# EAGLE board ESC PRODUKSI (EAGLE 9.6.2)
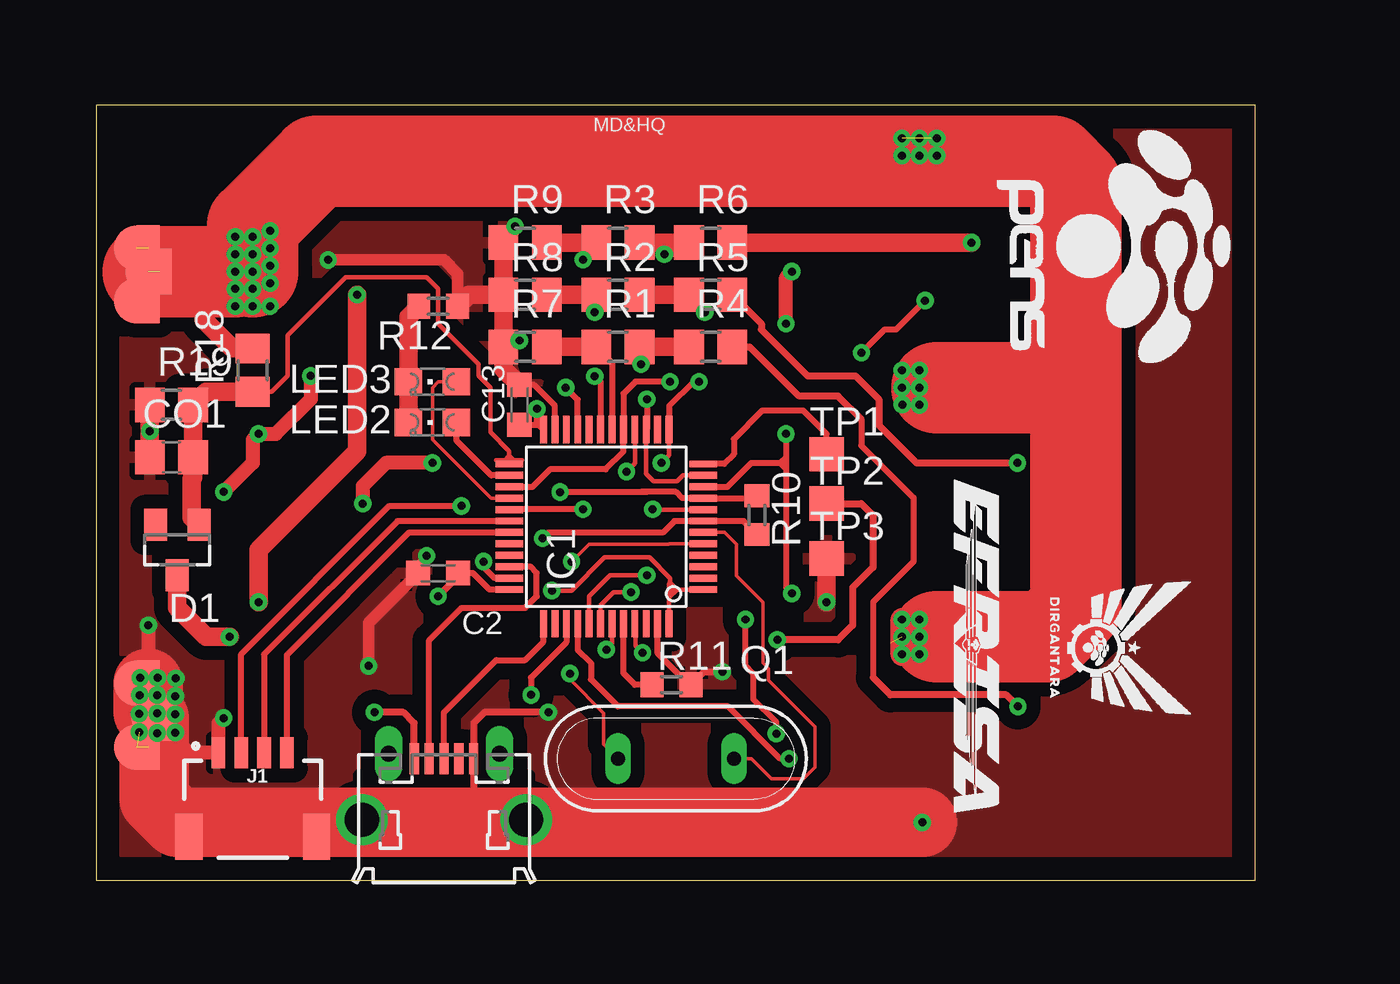
[diagram p0: board, top side]
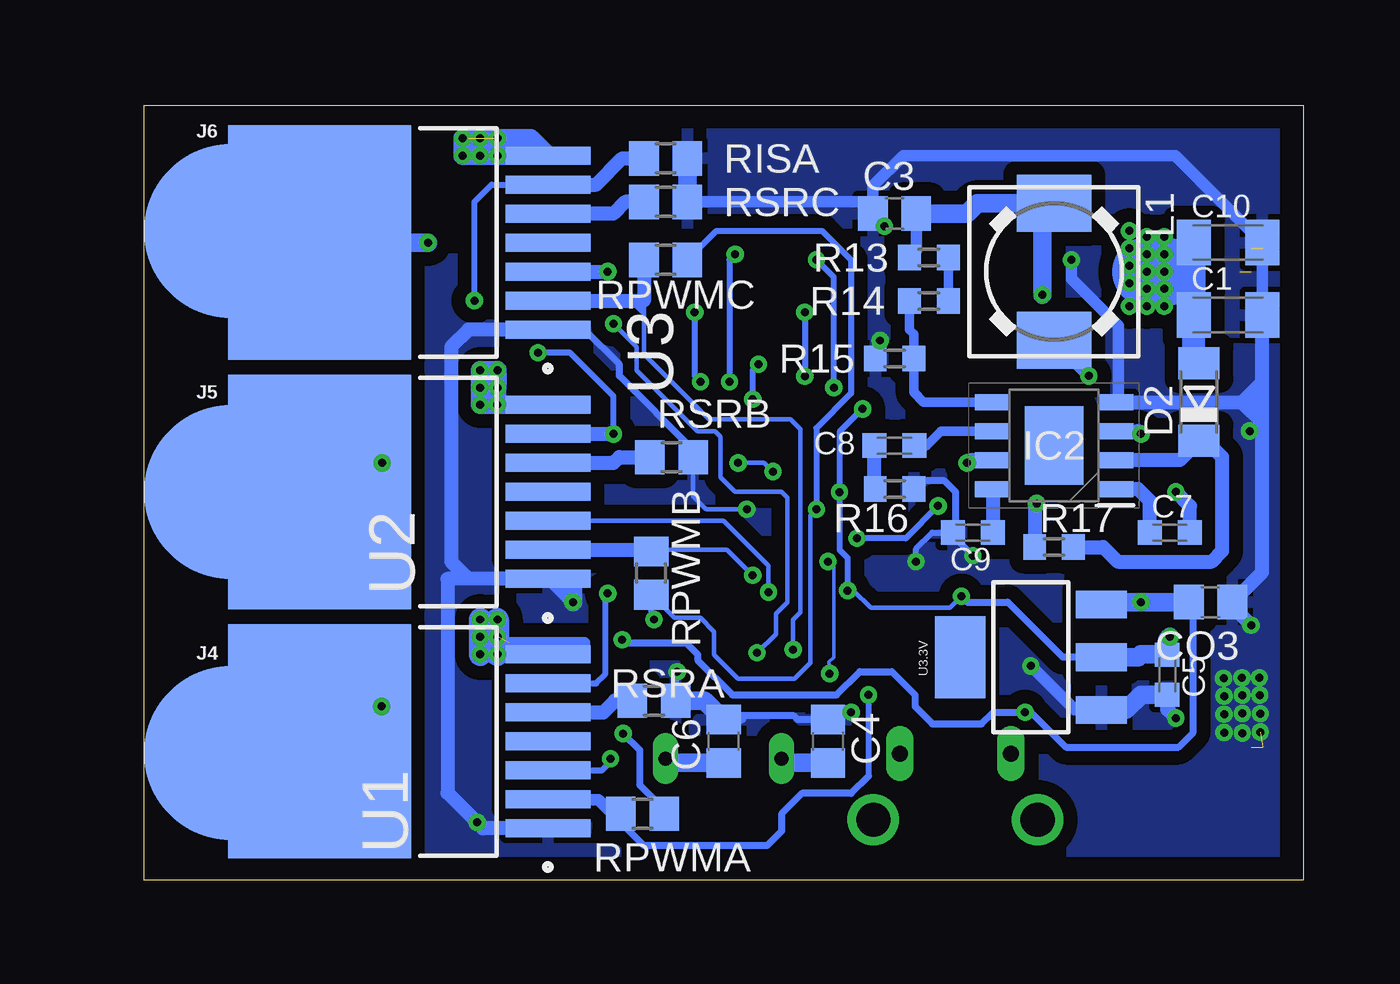
[diagram p1: board, bottom side, seen from below]

Size 50.78 x 33.96 mm. Coordinates in mm from the lower left corner, seen from the top.
Outline: 0,0 50.78,0 50.78,33.96 0,33.96 0,0
Copper layers (1*16): Top 0.035mm / dielectric 1.5mm / Bottom 0.035mm
Design rules "default *": minimum track width 6mil, minimum drill 0.35mm, track to track 24mil, track to pad 24mil, pad to pad 24mil, via to via 24mil, smd to smd 6mil, copper to edge 40mil, drill to drill 6mil, minimum pad ring 10mil, minimum via ring 8mil, stop-mask expansion 4mil, vias tented up to drill 0mil, thermal gap 10mil

## Footprints (pad centres in the part's own frame; a part is rotated, then mirrored left to right if it is on the bottom)
C1206K = smd 1.5 x 2: 1 -1.5,0; 2 1.5,0
C0603K = smd 1.05 x 1.08: 1 -0.875,0; 2 0.875,0
C0805 = smd 1.3 x 1.5: 1 -0.95,0; 2 0.95,0
SOT23 = smd 1 x 1.4: 1 -0.95,-1.1; 2 0.95,-1.1; 3 0,1.1
SOD80C = smd 1.4 x 1.8: A 1.7,0; C -1.7,0
LQFP48 = smd 0.3 x 1.2: 1 -2.75,-4.25; 2 -2.25,-4.25; 3 -1.75,-4.25; 4 -1.25,-4.25; 5 -0.75,-4.25; 6 -0.25,-4.25; 7 0.25,-4.25; 8 0.75,-4.25; 9 1.25,-4.25; 10 1.75,-4.25; 11 2.25,-4.25; 12 2.75,-4.25; 25 2.75,4.25; 26 2.25,4.25; 27 1.75,4.25; 28 1.25,4.25; 29 0.75,4.25; 30 0.25,4.25; 31 -0.25,4.25; 32 -0.75,4.25; 33 -1.25,4.25; 34 -1.75,4.25; 35 -2.25,4.25; 36 -2.75,4.25 | smd 1.2 x 0.3: 13 4.25,-2.75; 14 4.25,-2.25; 15 4.25,-1.75; 16 4.25,-1.25; 17 4.25,-0.75; 18 4.25,-0.25; 19 4.25,0.25; 20 4.25,0.75; 21 4.25,1.25; 22 4.25,1.75; 23 4.25,2.25; 24 4.25,2.75; 37 -4.25,2.75; 38 -4.25,2.25; 39 -4.25,1.75; 40 -4.25,1.25; 41 -4.25,0.75; 42 -4.25,0.25; 43 -4.25,-0.25; 44 -4.25,-0.75; 45 -4.25,-1.25; 46 -4.25,-1.75; 47 -4.25,-2.25; 48 -4.25,-2.75
SOIC127P600X170-9N = smd 1.525 x 0.7: 1 -2.712,1.905; 2 -2.712,0.635; 3 -2.712,-0.635; 4 -2.712,-1.905; 5 2.712,-1.905; 6 2.712,-0.635; 7 2.712,0.635; 8 2.712,1.905 | smd 2.56 x 3.45: 9 0,0
JST04_1MM_RA = smd 0.6 x 1.35: 1 -1.5,0; 2 -0.5,0; 3 0.5,0; 4 1.5,0 | smd 1.2 x 2: NC1 2.8,-3.675; NC2 -2.8,-3.675
CIRCULARPAD = smd 2 x 2: P$1 0,0 | smd 2.007 x 1.016: P$2 0,-0.508
SNAP-MALE = smd 7.62 x 7.62: 2 0,0
DR74 = smd 2.5 x 3.25: 1 -3,0; 2 3,0
CHIPLED_0805 = smd 1.2 x 1.2: A 0,-1.05; C 0,1.05
QS = drill 0.61 long: 1 -2.54,0; 2 2.54,0
R0805 = smd 1.3 x 1.5: 1 -0.95,0; 2 0.95,0
R0603 = smd 1 x 1.1: 1 -0.85,0; 2 0.85,0
TP15SQ = smd 1.5 x 1.5: TP 0,0
TO127P1500X440-8N-1 = smd 3.708 x 0.787: 1 -5.004,3.81; 2 -5.004,2.54; 3 -5.004,1.27; 4 -5.004,0; 5 -5.004,-1.27; 6 -5.004,-2.54; 7 -5.004,-3.81 | smd 8.001 x 10.262: 8 5.004,0
SOT223 = smd 1.219 x 2.235: 1 -2.311,-3.099; 2 0,-3.099; 3 2.311,-3.099 | smd 3.6 x 2.2: 4 0,3.099
ZX62D-B-5PA8 = smd 1.35 x 0.4: 1 4.825,1.3; 2 4.825,0.65; 3 4.825,0; 4 4.825,-0.65; 5 4.825,-1.3 | drill 1.5: S1 2.15,-3.6; S2 2.15,3.6 | drill 0.7 long: S3 5.05,2.425; S4 5.05,-2.425

## Placement (x,y rotation side)
C1  10u  [C1206K]  3.3,24.77 0 bottom
C2  100n  [C0603K]  14.99,13.46 180 top
C3  100nF  [C0805]  17.91,29.21 0 bottom
C4  22pF  [C0805]  20.83,6.1 270 bottom
C5  100n  [C0603K]  5.97,9.02 270 bottom
C6  22pF  [C0805]  25.4,6.1 270 bottom
C7  10n  [C0603K]  5.84,15.24 0 bottom
C8  3.9n  [C0603K]  17.91,19.05 180 bottom
C9  100n  [C0603K]  14.48,15.24 180 bottom
C10  10u  [C1206K]  3.3,27.94 0 bottom
C13  100n  [C0603K]  18.54,20.83 90 top
CO1  100nF  [C0805]  3.3,18.54 0 top
CO3  22uF  [C0805]  4.06,12.19 180 bottom
D1  BAT54  [SOT23]  3.56,14.48 180 top
D2  [SOD80C]  4.57,20.95 90 bottom
IC1  STM32F303CBT  [LQFP48]  22.35,15.49 90 top
IC2  MP2307DN-LF-Z  [SOIC127P600X170-9N]  10.92,19.05 180 bottom
J1  [JST04_1MM_RA]  6.86,5.59 0 top
J2  LED_PAD  [CIRCULARPAD]  1.78,8.64 90 top
J3  LED_PAD  [CIRCULARPAD]  1.78,25.4 90 top
J4  [SNAP-MALE]  46.99,5.59 0 bottom
J5  [SNAP-MALE]  46.99,17.02 0 bottom
J6  [SNAP-MALE]  46.99,28.45 0 bottom
J7  LED_PAD  [CIRCULARPAD]  1.78,27.69 90 top
J8  LED_PAD  [CIRCULARPAD]  1.78,5.84 90 top
J9  LED_PAD  [CIRCULARPAD]  2.29,26.67 90 top
J10  LED_PAD  [CIRCULARPAD]  2.54,7.11 90 top
L1  4R7  [DR74]  10.92,26.67 270 bottom
LED2  Red  [CHIPLED_0805]  14.73,20.07 90 top
LED3  hijau  [CHIPLED_0805]  14.73,21.84 90 top
Q1  16Mhz  [QS]  25.4,5.33 0 top
R1  20K  [R0805]  22.86,23.37 0 top
R2  20K  [R0805]  22.86,25.65 0 top
R3  20K  [R0805]  22.86,27.94 0 top
R4  100K  [R0805]  26.92,23.37 0 top
R5  100K  [R0805]  26.92,25.65 0 top
R6  100K  [R0805]  26.92,27.94 0 top
R7  82K  [R0805]  18.8,23.37 0 top
R8  82K  [R0805]  18.8,25.65 0 top
R9  82K  [R0805]  18.8,27.94 0 top
R10  10k  [R0603]  28.96,16 90 top
R11  10k  [R0603]  25.21,8.57 0 top
R12  100R  [R0603]  14.99,25.15 180 top
R13  43k  [R0603]  16.41,27.29 0 bottom
R14  1,2K  [R0603]  16.41,25.38 180 bottom
R15  10k  [R0603]  17.91,22.86 0 bottom
R16  6.8k  [R0603]  17.91,17.14 180 bottom
R17  100K  [R0603]  10.92,14.61 0 bottom
R18  100K  [R0805]  6.86,22.35 90 top
R19  20K  [R0805]  3.3,20.83 0 top
RISA  1k  [R0805]  27.94,31.62 0 bottom
RPWMA  10k  [R0805]  28.96,2.92 0 bottom
RPWMB  10k  [R0805]  28.57,13.46 270 bottom
RPWMC  10k  [R0805]  27.94,27.18 0 bottom
RSRA  20R  [R0805]  28.45,7.87 0 bottom
RSRB  20R  [R0805]  27.69,18.54 0 bottom
RSRC  20R  [R0805]  27.94,29.72 0 bottom
TP1  PTR1TP15SQ  [TP15SQ]  32,18.67 0 top
TP2  PTR1TP15SQ  [TP15SQ]  32,16.51 0 top
TP3  PTR1TP15SQ  [TP15SQ]  32,14.1 0 top
U1  BTN8962TA  [TO127P1500X440-8N-1]  38.1,6.1 180 bottom
U2  BTN8962TA  [TO127P1500X440-8N-1]  38.1,17.02 180 bottom
U3  BTN8962TA  [TO127P1500X440-8N-1]  38.1,27.94 180 bottom
U3.3V  V_REG_317SMD  [SOT223]  11.94,9.78 90 bottom
X1  ZX62D-B-5PA8  [ZX62D-B-5PA8]  15.24,0.51 90 top

## Library data of the parts
C1 C2 C5 C7-C10 C13 = rcl; SPICEPREFIX: C
C3 C4 C6 CO1 CO3 RISA RPWMA RPWMB RPWMC RSRA RSRB RSRC = rcl
D1 D2 = diode
IC1 = STM32F303x; SPICEPREFIX: X
IC2 = MP2307DN-LF-Z; ARROW_PART_NUMBER: MP2307DN-LF-Z; DESCRIPTION: Switching Voltage Regulators 3A/23VSynchRectified Step-down Converter; HEIGHT: 1.7mm; MANUFACTURER_NAME: Monolithic Power Systems (MPS); MANUFACTURER_PART_NUMBER: MP2307DN-LF-Z; MOUSER_PART_NUMBER: 946-MP2307DNLFZ; MOUSER_PRICE-STOCK: https://www.mouser.co.uk/ProductDetail/Monolithic-Power-Systems-MPS/MP2307DN-LF-Z?qs=rC7bBWoQAAmsFilkwcof5g%3D%3D
J1 = SparkFun-Connectors; PROD_ID: CONN-10310; SF_ID: PRT-10208
J2-J10 = SparkFun-Connectors
L1 = inductors; SPICEPREFIX: L
LED2 LED3 = led
Q1 = special
R1-R19 = rcl; SPICEPREFIX: R
TP1-TP3 = testpad
U1-U3 = BTN8962TA
U3.3V = SparkFun-PowerIC
X1 = zx62d-b-5pa8-oshpark_10; MF: Hirose; MPN: ZX62D-B-5PA8; OC_FARNELL: 2300438; OC_NEWARK: 69W0712

## Nets
1: D2.C IC2.2 R17.2
5V: C3.2 CO3.2 L1.1 R13.1 TP2.TP U3.3V.3 X1.1
12V: C1.1 C10.1 D2.A J3.P$1 J3.P$2 J7.P$1 J7.P$2 J9.P$1 J9.P$2 R18.2 U1.7 U2.7 U3.7
GND: C1.2 C2.2 C3.1 C4.1 C5.2 C6.1 C9.2 C10.2 C13.2 CO1.1 CO3.1 IC1.8 IC1.23 IC1.35 IC1.47 IC2.4 J1.1 J2.P$1 J2.P$2 J8.P$1 J8.P$2 J10.P$1 J10.P$2 R7.1 R8.1 R9.1 R11.2 R12.1 R15.1 R16.1 R19.1 RISA.2 RSRA.2 RSRB.2 RSRC.2 TP3.TP U1.1 U2.1 U3.1 U3.3V.1 X1.5
N$1: RSRA.1 U1.5
N$2: RSRB.1 U2.5
N$3: RSRC.1 U3.5
N$4: C4.2 IC1.5 Q1.1
N$5: C7.1 IC2.1
N$6: C7.2 IC2.3 L1.2
N$7: C6.2 IC1.6 Q1.2
N$8: LED2.C LED3.C R12.2
N$10: IC1.44 R11.1
N$12: R13.2 R14.1
N$13: IC2.5 R14.2 R15.2
N$14: C8.2 R16.2
N$15: C8.1 IC2.6
N$16: IC2.7 R17.1
N$17: IC1.4
N$18: IC1.3
N$19: IC1.2
N$20: C9.1 IC2.8
PA0: IC1.10 RISA.1 U1.6 U2.6 U3.6
PA1: IC1.11 IC1.15 R1.2 R4.1
PA3: IC1.13 IC1.16 R2.2 R5.1
PA8: IC1.29 RPWMA.2 RPWMB.2 RPWMC.2
PB0: IC1.18 R1.1 R7.2
PB1: IC1.19 R2.1 R8.2
PB3: IC1.39 RPWMA.1 U1.2
PB4: IC1.40 U1.3
PB5: IC1.41 RPWMB.1 U2.2
PB6: IC1.42 U2.3
PB7: IC1.43 RPWMC.1 U3.2
PB8: IC1.45 U3.3
PB10: IC1.21 R3.1 R9.2
PB12: CO1.2 D1.1 IC1.25 R18.1 R19.2
PB13: IC1.26 LED2.A
PB14: IC1.17 IC1.27 R3.2 R6.1
PB15: IC1.28 LED3.A
PHASE_A: J4.2 R4.2 U1.8
PHASE_B: J5.2 R5.2 U2.8
PHASE_C: J6.2 R6.2 U3.8
PWM_IN: IC1.12 TP1.TP
RST: IC1.7 J1.2 R10.1
RX: IC1.31 J1.4
SWCLK: IC1.37 X1.3
SWDIO: IC1.34 X1.2
TX: IC1.30 J1.3
VCC: C2.1 C5.1 C13.1 D1.3 IC1.1 IC1.9 IC1.24 IC1.36 IC1.48 R10.2 U3.3V.2

## Tracks (layer width: path | path; a pad name or v marks a point on that pad's centre or on a via)
1
  Bottom 0.61: IC2.2 5.41,18.41 D2.C 4.27,19.25 3.56,18.54 3.56,14.43 4.02,13.97 8.13,13.97 8.76,14.61 R17.2
5V  (via drill 0.35)
  Top 0.305: X1.1 13.94,6.89 13.46,7.37 v12.19,7.37 | TP2.TP 33.53,16.51 34.04,16 34.04,13.72 33.15,12.83 33.15,11.18 32.51,10.54 v29.85,10.54
  Top 0.813: v7.11,12.19 7.11,14.48 11.43,18.8 v11.43,25.65
  Bottom 0.305: CO3.2 4.83,12 4.83,6.48 5.46,5.84 10.41,5.84 11.94,7.37 v12.19,7.37 13.59,7.37 14.1,6.86 16.26,6.86 17.02,7.62 17.02,8.13 18.03,9.14 19.43,9.14 20.45,8.13 25.02,8.13 26.54,9.65 26.54,9.91 27.05,10.41 29.72,10.41 | 17.31,27.56 17.26,27.5 R13.1
  Bottom 0.406: R13.1 17.16,27.29 | v29.85,10.54 29.72,10.41
  Bottom 0.508: C3.2 16.96,27.59 R13.1
  Bottom 0.813: L1.1 11.43,29.67 | 11.43,29.67 14.27,29.67 14.73,29.21 C3.2 | CO3.2 v7.11,12.19 8.74,12.19 U3.3V.3 | v11.43,25.65 11.43,29.67
12V  (via drill 0.35)  (4 unrouted)
  Top 0.203: v36.07,10.67 36.83,10.67
  Top 0.254: 36.83,21.59 v36.07,21.59
  Top 0.61: 36.58,31.75 36.58,31.5
  Top 0.813: 36.58,32.51 36.58,31.75 | J9.P$1 J3.P$2 | J7.P$1 2.29,27.18 J9.P$1 | J3.P$1 1.78,26.16 J9.P$1 | R18.2 5.97,23.3 4.7,24.57 4.7,26.48 4.89,26.67
  Top 1.016: v36.07,11.43 v35.31,11.43 v35.31,10.67 v35.31,9.91
  Top 4: J9.P$1 4.89,26.67 v6.1,26.67 | v6.86,26.67 6.86,28.7 9.65,31.5 36.58,31.5 41.91,31.5 42.93,30.48 42.93,21.84 | 36.83,10.67 41.66,10.67 42.93,11.94 42.93,21.84 | 42.93,21.84 42.67,21.59 36.83,21.59
  Bottom 0.203: 34.54,9.91 v35.31,10.67
  Bottom 0.254: v6.1,26.67 5.99,26.77 5.82,26.77 5.44,27.16 5.44,27.3 C10.1
  Bottom 0.508: 33.6,10.41 31.5,10.41 31.5,10.16 31.62,10.03 | v35.31,10.67 v36.07,10.67 v36.07,9.91 v35.31,9.91 | U1.7 33.6,10.41 | 33.6,10.41 34.8,10.41
  Bottom 0.61: U3.7 34.04,31.75 | v35.31,22.35 35.31,21.01 35.13,20.83 U2.7 | 34.54,9.91 35.31,10.29 v35.31,10.67
  Bottom 0.813: v36.07,20.83 v36.07,21.59 v36.07,22.35 v35.31,22.35 v35.31,21.59 35.32,21.58 35.32,20.88 35.34,20.86 | v35.32,20.84 36.06,20.84 v36.07,20.83 | U2.7 v36.07,20.83 | U3.7 33.86,32.51 v35.31,32.51 36.83,32.51 36.83,31.75 35.05,31.75
  Bottom 1.016: C10.1 C1.1 4.8,22.88 D2.A | v35.31,11.43 v35.31,10.67 v35.31,9.91 | v36.07,11.43 v36.07,9.91
  Bottom 3.048: v6.1,26.67 v6.86,26.67
GND  (via drill 0.35)  (2 unrouted)
  Top 0.203: IC1.8 24.4,16.24 v24.38,16.26
  Top 0.254: IC1.35 17.46,13.24 16.97,13.73 v16.97,13.97 | R11.2 25.97,8.57 24.6,9.94 IC1.47 | IC1.23 20.1,20.79 19.19,21.7 C13.2 | v18.54,23.65 18.13,23.65 R7.1
  Top 0.305: X1.5 16.54,4.79 16.51,4.76 | X1.5 16.54,2.57 16.51,2.54 | X1.5 16.54,6.89 17.02,7.37 v19.81,7.37 | R11.2 26.63,9.14 v27.43,9.14 | C2.2 14.11,13.86 v14.48,14.22
  Top 0.508: R12.1 15.84,26.58 15.24,27.18 v10.16,27.18 | R9.1 18.26,28.35 18.26,28.56 v18.36,28.66 | C2.2 11.94,11.29 v11.94,9.4
  Top 0.61: J10.P$1 4.06,5.59 J1.1 5.36,6.88 v5.59,7.11 | v2.29,11.18 2.29,8.89 2.29,7.37
  Top 0.813: R9.1 R8.1 | R8.1 R7.1 17.85,22.4 C13.2 | R12.1 16.34,25.65 R8.1 | J2.P$1 2.03,8.64 2.29,8.89 | R19.1 v2.35,19.68 CO1.1 | TP3.TP v32,12.19
  Top 3.048: v36.19,2.54 16.51,2.54 3.56,2.54 2.54,3.56 J10.P$1 2.29,7.37 J2.P$2
  Bottom 0.203: v24.38,16.26 26.16,16.26 26.74,16.83 RSRB.2 | v2.35,19.68 1.8,19.68
  Bottom 0.254: v16.97,13.97 16.97,14.53 16.26,15.24 C9.2 | R15.1 18.76,23.43 v18.54,23.65
  Bottom 0.305: 24.57,7.05 C6.1 25.23,7.21 22.31,7.21 22.14,7.05 C4.1 20.51,7.37 v19.81,7.37 | v27.43,9.14 27.5,9.08 RSRA.2 | R16.1 16.68,17.53 15.75,17.53 15.24,17.02 15.24,15.35 C9.2 15.35,15.1 v14.48,14.22 | RSRB.2 26.74,18.86 29.97,22.1 29.97,22.61 31.5,24.13 U3.1
  Bottom 0.508: v10.16,27.18 10.16,26.36 8.11,24.3 8.11,21.19 7.87,20.95 | RSRC.2 19.36,29.72 C3.1 | C3.1 18.86,30.42 17.53,31.75 5.61,31.75 C10.2 C1.2 | C3.1 18.86,29.16 v18.36,28.66 | v11.94,9.4 10.01,7.47 U3.3V.1
  Bottom 0.61: U1.1 35.94,2.29 v36.19,2.54 37.5,3.84 37.5,13.21 U2.1 | U3.1 36.58,24.13 37.34,23.37 37.34,13.97 36.7,13.33 | IC2.4 7.87,20.95 2.67,20.95 | 1.8,21.82 C1.2 | 1.8,21.82 2.54,21.08 | 2.54,21.08 2.67,20.95 | v5.59,7.11 5.97,7.49 C5.2 | v2.29,11.18 3.11,12 CO3.1 1.8,13.5 1.8,19.68 1.8,20.07 | 1.8,20.07 1.8,21.08 | 1.8,21.08 1.8,21.82 | 2.67,20.95 2.67,20.93 1.8,20.07 | 2.54,21.08 1.8,21.08 | v32,12.19 32.98,13.17 33.1,13.17
  Bottom 0.813: RSRC.2 RISA.2 | C6.1 26.23,7.87 RSRA.2 | U3.3V.1 7.77,7.47 7.1,8.14 C5.2 | v32,12.19 32,12.95
  other vias: 1.93,8.88 2.69,8.88 1.91,8.12 2.67,8.12 1.89,7.3 2.67,7.32 1.89,6.5 2.67,6.46 3.49,8.86 3.47,8.08 3.47,7.28 3.47,6.48
  pour Top (isolate 0.254): 0.25,33.78 0.25,0.25 50.55,0.25 50.55,33.78
  pour Bottom: 0.25,33.78 0.25,0.25 50.55,0.25 50.55,33.78
N$1
  Bottom 0.61: U1.5 30.67,7.37 30.16,7.87 RSRA.1
N$2
  Bottom 0.61: U2.5 30.23,18.29 29.97,18.54 RSRB.1
N$3
  Bottom 0.61: RSRC.1 29.72,29.72 30.23,29.21 U3.5
N$4  (via drill 0.35)
  Top 0.152: v20.75,9.06 20.75,8.8 22.22,7.33 22.22,5.97 Q1.1 | v20.83,13.97 21.59,14.73 25.08,14.73 25.09,14.74 IC1.5
  Bottom 0.152: v20.83,13.97 20.57,13.72 20.57,9.78 20.78,9.58 20.78,9.08 v20.75,9.06
  Bottom 0.813: C4.2 22.67,5.15 Q1.1
N$5
  Bottom 0.61: C7.1 6.72,16.62 7.24,17.14 IC2.1
N$6  (via drill 0.35)
  Top 0.61: v9.4,22.1 9.4,21.08 7.87,19.56 v7.11,19.56 6.86,19.3 6.86,18.29 v5.59,17.02
  Bottom 0.61: IC2.3 7.24,19.68 v7.11,19.56 | L1.2 9.4,22.15 v9.4,22.1 | C7.2 4.97,16.4 v5.59,17.02
N$7
  Top 0.152: Q1.2 28.7,5.33 29.59,4.45 30.99,4.45 31.5,4.95 31.5,6.73 29.46,8.76 29.46,9.27 29.21,9.53 29.21,12.19 28.05,13.35 28.05,14.73 27.54,15.24 IC1.6
  Bottom 0.813: C6.2 27.75,5.15 Q1.2
N$8
  Top 0.813: LED2.C LED3.C 13.68,24.69 R12.2
N$9  (via drill 0.35)
  other vias: 6.1,28.19
N$10
  Top 0.254: IC1.44 23.1,9.08 23.61,8.57 R11.1
N$11  (via drill 0.35)
  other vias: 6.1,27.43
N$12
  Bottom 0.406: R13.2 R14.1
N$13
  Bottom 0.406: R14.2 17.26,24.11 17.06,23.91 R15.2 17.06,21.38 16.64,20.95 IC2.5
N$14
  Bottom 0.61: R16.2 18.78,17.17 C8.2
N$15
  Bottom 0.406: C8.1 16.52,19.05 15.89,19.68 IC2.6
N$16  (via drill 0.35)
  Top 0.61: v14.73,18.29 12.7,18.29 11.68,17.27 v11.68,16.51
  Bottom 0.61: IC2.7 14.61,18.41 v14.73,18.29 | v11.68,16.51 11.77,16.42 R17.1
N$20
  Bottom 0.61: IC2.8 13.6,17.11 C9.1
N$21  (via drill 0.35)
  other vias: 6.1,25.91
N$22  (via drill 0.35)
  other vias: 6.1,25.15
N$23  (via drill 0.35)
  other vias: 6.86,28.19
N$24  (via drill 0.35)
  other vias: 6.86,27.43
N$25  (via drill 0.35)
  other vias: 6.86,25.91
N$26  (via drill 0.35)
  other vias: 6.86,25.15
N$27  (via drill 0.35)
  other vias: 7.62,28.45
N$28  (via drill 0.35)
  other vias: 7.62,27.69
N$29  (via drill 0.35)
  other vias: 7.62,26.92
N$30  (via drill 0.35)
  other vias: 7.62,26.16
N$31  (via drill 0.35)
  other vias: 7.62,25.15
N$32  (via drill 0.35)
  Top 0.254: v36.07,32.51 35.31,32.51
N$33  (via drill 0.35)
  other vias: 36.83,32.51
N$34  (via drill 0.35)
  other vias: 36.07,31.75
N$35  (via drill 0.35)
  other vias: 35.31,31.75
N$36  (via drill 0.35)
  other vias: 36.83,31.75
PA0  (via drill 0.35)
  Top 0.254: IC1.10 27.66,17.24 28.7,18.29 29.97,18.29 | v30.23,19.56 30.23,18.54 | 30.23,18.54 30.23,18.29 | 30.23,18.29 30.23,18.03 | 30.23,18.03 30.23,12.83 v30.48,12.57 | v33.53,23.11 34.54,24.13 35.05,24.13 v36.32,25.4 | 30.23,18.29 29.97,18.29 | 30.23,18.54 29.97,18.29 | 29.97,18.29 30.23,18.03
  Bottom 0.254: U1.6 30.99,8.64 30.61,9.02 30.61,12.45 v30.48,12.57 | v30.23,19.56 30.23,21.21 32.13,23.11 v33.53,23.11 | v36.32,25.4 36.32,29.72 35.56,30.48 U3.6
  Bottom 0.61: U3.6 30.99,30.48 29.85,31.62 RISA.1 | U2.6 v30.23,19.56
PA1  (via drill 0.35)
  Top 0.203: IC1.11 25.71,17.74 25.46,17.49 24.42,17.49 24.1,17.81 IC1.15
  Top 0.254: 25.15,23.37 24.64,23.37 v23.88,22.61 | v24.13,21.08 24.13,19.77 IC1.15
  Top 0.813: R1.2 25.15,23.37 R4.1
  Bottom 0.254: v23.88,22.61 24.13,22.35 v24.13,21.08
PA3  (via drill 0.35)
  Top 0.203: IC1.13 25.1,18.62 v24.76,18.29 | IC1.16 23.6,18.27 v23.24,17.91
  Top 0.254: R5.1 26.67,24.96 v26.67,24.89 | IC1.13 25.1,20.78 26.16,21.84 v26.42,21.84
  Top 0.813: R5.1 R2.2
  Bottom 0.203: v24.76,18.29 23.62,18.29 v23.24,17.91
  Bottom 0.254: v26.67,24.89 26.67,22.1 v26.42,21.84
PA8  (via drill 0.35)
  Top 0.254: v21.34,16.26 18.11,16.26 IC1.29 | v29.8,6.43 29.8,6.94 28.79,7.96 28.79,9.06 28.45,9.4 v28.45,11.43
  Bottom 0.203: RPWMB.2 27.56,11.5 26.42,11.5 25.81,10.89 25.81,9.88 24.76,8.83 22.29,8.83 21.59,9.53 21.59,16 v21.34,16.26
  Bottom 0.254: RPWMC.2 25.72,28.45 21.08,28.45 19.81,27.18 19.81,21.34 21.34,19.81 v21.34,16.26 | RPWMB.2 28.57,11.56 v28.45,11.43
  Bottom 0.305: v29.8,6.43 29.08,5.71 29.08,4.19 28.01,3.11 RPWMA.2
PB0
  Top 0.254: R1.1 22.6,22.68 IC1.18
  Top 0.813: R7.2 R1.1
PB1  (via drill 0.35)
  Top 0.254: R2.1 21.84,25.59 v21.84,24.89 | v21.84,22.09 22.1,21.83 IC1.19
  Top 0.813: R2.1 R8.2
  Bottom 0.254: v21.84,24.89 v21.84,22.09
PB3  (via drill 0.35)
  Top 0.254: IC1.39 20.6,10.44 19.05,8.89 v19.05,8.13
  Bottom 0.254: v19.05,8.13 19.05,4.57
  Bottom 0.305: 19.05,4.57 19.81,3.81 21.97,3.81 22.86,2.92 22.86,2.16 23.5,1.52 28.89,1.52 30.03,2.67 30.03,2.79 RPWMA.1
  Bottom 0.508: RPWMA.1 30.26,2.92 30.88,3.54 33.78,3.54 33.77,3.56 U1.2
PB4  (via drill 0.35)
  Top 0.254: v30.35,5.33 29.97,5.33 27.69,7.62 22.86,7.62 21.68,8.8 21.68,9.53 21.1,10.1 IC1.40
  Bottom 0.254: U1.3 30.73,4.83 30.35,5.21 v30.35,5.33
PB5  (via drill 0.35)
  Top 0.203: IC1.41 21.6,12.46 22.51,13.36 v24.13,13.36
  Bottom 0.203: v24.13,13.36 25.25,14.48 28.64,14.48
  Bottom 0.61: U2.2 28.64,14.48 RPWMB.1
PB6  (via drill 0.35)
  Top 0.203: IC1.42 22.1,12.06 22.67,12.63 v23.43,12.63
  Bottom 0.203: v23.43,12.63 23.43,13.78 25.4,15.75 U2.3
PB7  (via drill 0.35)
  Top 0.203: IC1.43 22.6,10.36 v22.35,10.11
  Bottom 0.203: v22.35,10.11 22.35,11.43 22.04,11.74 22.04,19.75 22.48,20.19 26.04,20.19 28.89,23.05 28.89,24.89 | 28.89,26.92 28.89,24.89 | 29.46,25.4 28.96,24.89 28.89,24.89
  Bottom 0.61: U3.2 29.46,25.4 28.89,25.4 28.89,26.92 RPWMC.1
PB8  (via drill 0.35)
  Top 0.203: IC1.45 23.62,11.22 23.62,10.29 v23.94,9.97
  Top 0.61: v30.23,24.38 30.23,26.42 v30.48,26.67
  Bottom 0.203: v23.94,9.97 23.11,10.79 23.11,11.68 22.61,12.19 22.61,16.76 22.86,17.02 24.89,17.02 25.53,17.65 25.53,19.43 25.78,19.68 26.54,19.68 29.21,22.35 29.21,23.37 v30.23,24.38
  Bottom 0.61: U3.3 v30.48,26.67
PB10  (via drill 0.35)
  Top 0.254: IC1.21 21.1,21.06 v20.57,21.59 | 21.34,27.94 v21.34,27.19
  Top 0.813: R3.1 21.34,27.94 R9.2
  Bottom 0.254: v20.57,21.59 20.57,26.43 v21.34,27.19
PB12
  Top 0.203: IC1.25 18.1,18.41 | 18.1,18.41 18.1,18.6 | R18.1 7.69,21.4 8.38,22.1 8.38,23.88 10.92,26.42 14.48,26.42 14.99,25.91 14.99,24.38 16.76,22.61 16.76,22.1 17.27,21.59 17.27,19.63 18.1,18.8 18.1,18.61 | 18.1,18.41 18.29,18.41 | 18.29,18.41 18.67,18.41 | 18.1,18.41 17.91,18.41 | 17.91,18.41 17.53,18.41 | 18.1,18.61 17.91,18.41 | 18.1,18.61 18.1,18.6 | 18.1,18.6 18.29,18.41
  Top 0.813: D1.1 4.19,15.89 4.19,17.6 4.25,17.65 CO1.2 R19.2 4.83,21.4 R18.1
PB13
  Top 0.254: IC1.26 17.31,17.74 15.78,19.27 LED2.A
PB14  (via drill 0.35)
  Top 0.254: IC1.27 19.12,17.24 19.88,18.01 22.32,18.01 23.1,18.78 IC1.17 23.1,21.32 23.62,21.84 v25.15,21.84 | R6.1 25.47,27.43 v24.89,27.43
  Top 0.813: R6.1 R3.2
  Bottom 0.254: v24.89,27.43 25.15,27.18 v25.15,21.84
PB15
  Top 0.152: IC1.28 17.29,16.74 14.73,19.3 14.73,21.59 14.99,21.84 LED3.A
PHASE_A  (via drill 0.35)
  Top 0.254: 34.04,8.89 34.04,12.19 35.81,13.97 35.81,16.76 33.53,19.05 33.53,20.19
  Top 0.305: R4.2 28.64,23.37 30.79,21.21 32.51,21.21 33.53,20.19 | 34.04,8.89 34.8,8.13 39.88,8.13 v40.39,7.62
  Bottom 0.254: 43.69,6.1 U1.8 41.91,6.1 v40.39,7.62
  Bottom 0.813: 43.69,6.1 46.48,6.1 J4.2
PHASE_B  (via drill 0.35)
  Top 0.305: R5.2 29.14,24.38 29.14,24.13 31.18,22.1 33.27,22.1 34.29,21.08 34.29,19.94 35.94,18.29 v40.37,18.29
  Bottom 0.254: U2.8 41.83,18.29 41.66,18.29
  Bottom 0.813: 41.66,18.29 v40.37,18.29 | U2.8 J5.2
PHASE_C  (via drill 0.35)
  Top 0.813: R6.2 v38.35,27.94
  Bottom 0.813: v38.35,27.94 41.66,27.94 | 44.2,27.94 41.66,27.94 | 44.2,27.94 44.7,27.43 45.21,27.94 44.7,28.45 44.7,28.7 45.47,29.46 45.97,29.46 45.97,30.48 46.23,30.73 46.61,30.35 46.61,28.32 46.23,27.94 47.5,26.67 49.28,28.45 49.02,28.7 48.51,28.7 | 48.51,28.7 47.75,28.7 47.37,28.32 | 41.4,28.19 41.4,24.13 43.18,24.13 43.18,24.89 43.43,24.89 45.21,26.67 45.72,26.67 47.37,28.32 | 41.4,28.19 41.4,28.7 41.91,29.21 42.04,29.08 42.04,28.83 41.4,28.19 | 41.66,27.94 41.4,28.19 | 47.37,28.32 47.12,28.32 J6.2 46.48,27.94 44.2,27.94 | U3.8 47.75,27.94 48.51,28.7
PWM_IN
  Top 0.254: TP1.TP 32,19.56 30.99,20.57 29.18,20.57 27.94,19.33 27.94,18.67 27.51,18.24 IC1.12
RST  (via drill 0.35)
  Top 0.254: J1.2 6.36,9.91 12.85,16.4 v16,16.4 | v19.56,14.99 19.81,15.24 24.83,15.24 25.33,15.74 IC1.7 28.36,15.74 R10.1
  Bottom 0.254: v16,16.4 17.42,14.99 v19.56,14.99
RX
  Top 0.254: J1.4 8.36,9.88 13.72,15.24 IC1.31
SWCLK
  Top 0.254: X1.3 15.24,7.37 17.53,9.65 18.8,9.65 19.6,10.46 IC1.37
SWDIO
  Top 0.254: X1.2 14.59,10.53 16,11.94 18.8,11.94 19.3,12.45 19.3,13.46 19.02,13.74 IC1.34
TX
  Top 0.254: IC1.30 13.2,15.74 7.36,9.9 J1.3
VCC  (via drill 0.35)
  Top 0.203: IC1.48 25.1,12.4 | IC1.1 25.44,12.74 | 25.44,12.74 25.1,12.4 | 25.44,12.74 25.15,13.04 | v19.97,12.7 20.83,12.7 22.28,14.15 24.24,14.15 25.15,13.24 25.15,13.04 | 25.1,12.4 25.1,12.7 | 25.1,12.7 25.1,13 25.15,13.04 | 25.44,12.74 25.15,12.74 25.1,12.7
  Top 0.254: R10.2 28.85,16.74 IC1.9 25.67,16.74 25.4,17.02 24.13,17.02 | IC1.36 17.23,12.74 16.51,13.46 C2.1 | C13.1 19.39,19.95 IC1.24 19.31,20.04 v19.31,20.66 | 24.13,17.02 23.88,17.02 | 24.13,17.02 24.13,17.01 v20.32,17.01
  Top 0.305: C2.1 15.86,13.32 v14.99,12.45
  Top 0.813: v5.84,10.67 4.83,10.67 3.56,11.94 D1.3
  Bottom 0.203: v19.97,12.7 19.71,12.7 18.95,11.94 15.49,11.94 v14.99,12.45
  Bottom 0.254: v19.31,20.66 20.32,19.64 v20.32,17.02 | v20.32,17.02 20.32,14.48 19.97,14.12 v19.97,12.7 | v20.32,17.02 v20.32,17.01
  Bottom 0.305: U3.3V.2 10.54,9.78 12.95,12.19 14.73,12.19 v14.99,12.45
  Bottom 0.813: U3.3V.2 7.24,9.78 7.11,9.91 5.98,9.91 C5.1 5.97,10.54 v5.84,10.67

## Text on the board
tNames: MD&HQ | C:/Users/acer/Dropbox/My PC (LAPTOP-2KUNUL1E)/Documents/EAGLE/projects/esc PRODUKSI/logo_efrisa.bmp | C:/Users/acer/Dropbox/My PC (LAPTOP-2KUNUL1E)/Documents/EAGLE/projects/esc PRODUKSI/dirgantara.bmp
bDocu: C:/Users/acer/Dropbox/My PC (LAPTOP-2KUNUL1E)/Documents/EAGLE/projects/esc PRODUKSI/Untitled.bmp